# Altium PCB RHD2132_headstage1.PcbDoc
Units mm, origin at the board's own origin, x right, y up, seen from the top; angles counter-clockwise.
Board outline 11.81 x 14.27 mm, 4 copper layers (Top, Route2, Route3, Bottom), stack 2.11 mm thick; 8 components, 19 nets, 88 pads, 23 vias.
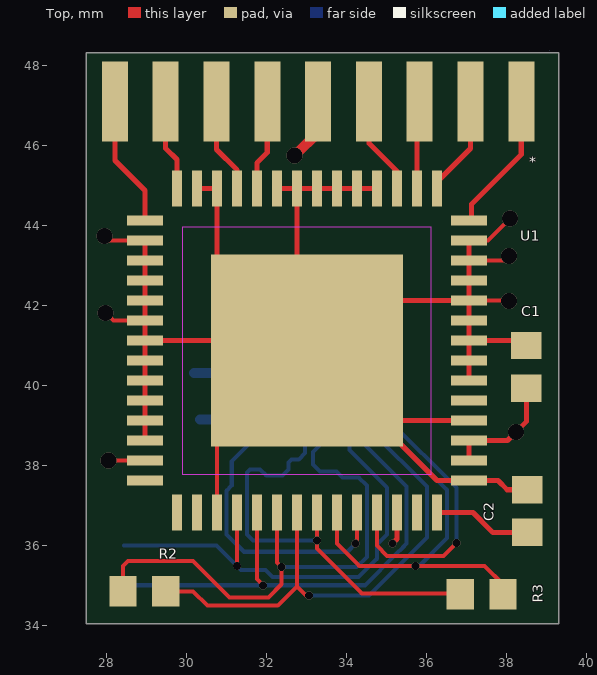
[diagram p0: Top view]
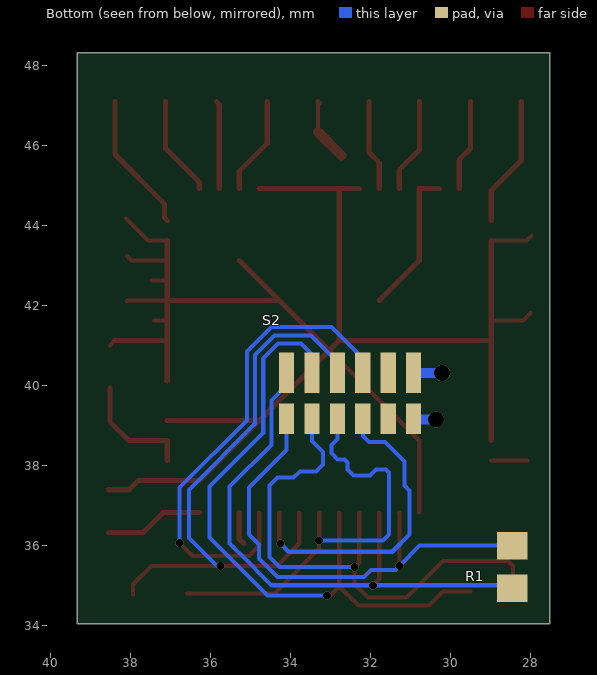
[diagram p1: Bottom view, seen from below]
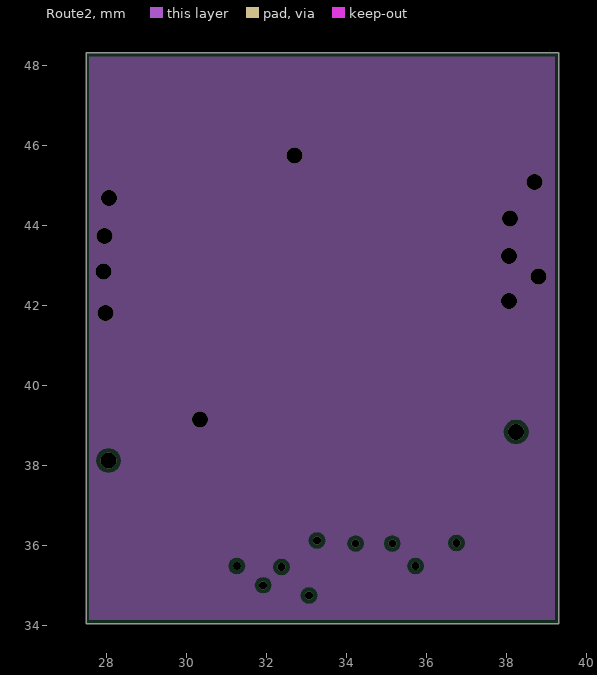
[diagram p2: Route2]
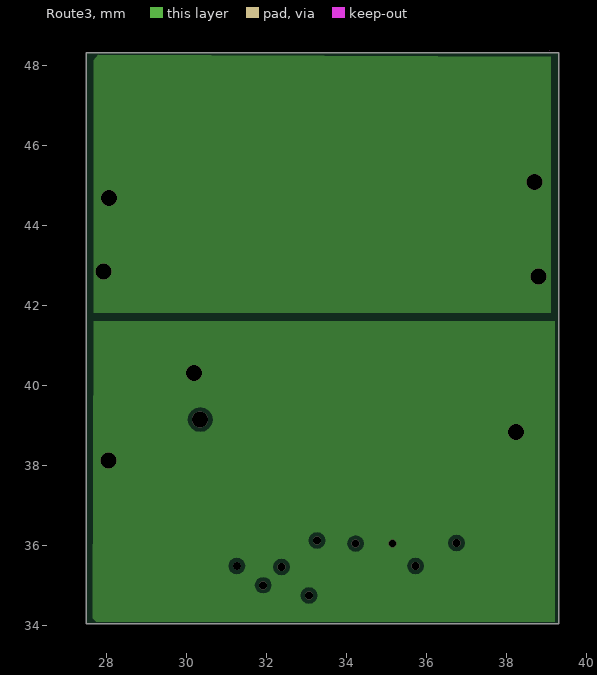
[diagram p3: Route3]

## Layer stack, top to bottom
Top Solder: solder mask 0.0102, Solder Resist, Dk 3.5
Top: signal copper 0.035
Dielectric 1: dielectric 0.32, FR-4, Dk 4.8
Route2: signal copper 0.035
Dielectric 2: prepreg 1.5, FR-4, Dk 4.8
Route3: signal copper 0.035
Dielectric 3: core 0.15, FR-4, Dk 4.8
Bottom: signal copper 0.035
Bottom Solder: solder mask 0.0102, Solder Resist, Dk 3.5

## Board outline
27.508,34.036 27.508,48.311 39.319,48.311 39.319,34.036
cut-out: 39.091,48.362

## Design rules (kind name [scope] priority, off if disabled: settings)
Clearance "Clearance (Same Net)" [All] p1: gap=0.102 ignorepadtopadclearanceinfootprint=FALSE
Clearance [All] p2: gap=0.102 ignorepadtopadclearanceinfootprint=FALSE
HoleSize HoleSize_For_NetClass_power [InNetClass('power')] p1: absolutevalues=TRUE maxlimit=0 minlimit=0 maxpercent=80.000 minpercent=20.000
HoleSize HoleSize_For_NetClass_thick [InNetClass('thick')] p2: absolutevalues=TRUE maxlimit=0 minlimit=0 maxpercent=80.000 minpercent=20.000
HoleSize [All] p3: absolutevalues=TRUE maxlimit=2540 minlimit=0.152 maxpercent=80.000 minpercent=20.000
HoleToHoleClearance mdDrill [All] p1: gap=0.381 allowstackedmicrovias=TRUE
PasteMaskExpansion mlMinCreamFrame [All] p1: expansion=0
PolygonConnect ThermalVias [IsVia] p1: connectstyle=Direct reliefconductorwidth=0.254 reliefentries=4 polygonreliefangle="90 Angle" airgapwidth=0.254
PolygonConnect [All] p2: connectstyle=Relief reliefconductorwidth=0.127 reliefentries=4 polygonreliefangle="90 Angle" airgapwidth=0.254
RoutingVias [All] p1: holewidth=0.152 width=0.457 viastyle="Through Hole" minholewidth=0.152 minwidth=0.457 maxholewidth=2.54 maxwidth=2.54
SolderMaskExpansion mlMinStopFrame [All] p1: expansion=0.102
Width Width_For_NetClass_power [InNetClass('power')] p1: maxlimit=1.219 minlimit=0.254 preferedwidth=0.61
Width Width_For_NetClass_thick [InNetClass('thick')] p2: maxlimit=2.032 minlimit=0.254 preferedwidth=1.016
Width [All] p3: maxlimit=254 minlimit=0.102 preferedwidth=0.102 minimp=50.000000 maximp=50.000000 favimp=50.000000
27 further rules are at their usual default settings.

## Components (designator, comment, footprint, x,y, rotation, side; value= is the part's Value field where it differs from the comment)
* "connector_dechuan" connector_dechuan 34.29,53.899 r0 top
C1 "100n" 0402 38.506,40.462 r90 top
C2 "10n" 0402 38.532,36.855 r90 top
R1 "100" 0402 28.448,35.458 r270 bottom
R2 "100" 0402 28.956,34.849 r0 top
R3 "100" 0402 37.389,34.773 r0 top
S2 "RHD2000-CABLE-AMP-SIDE" OMNETICS_PZN-12-AA 32.499,38.151 r0 bottom
U1 "RHD2132_QFN" QFN56_8_X_8_LARGE 33.02,40.869 r0 top

## Footprints (in the part's own frame and the unit in brackets; to place one, negate y for a bottom-side part, rotate by r counter-clockwise, add the part's x,y. Pads: shape width x height; smd on the part's side, far side on the other; paste and mask are expansions set on the pad)
0402 [mil]
  rect 27x30 smd: 1(-21,0) 2(21,0)
connector_dechuan [mm]
  rect 0.65x2 smd: 1(-6.071,-6.807) 2(-4.801,-6.807) 3(-3.531,-6.807) 4(-2.261,-6.807) 5(-0.991,-6.807) 6(0.279,-6.807) 7(1.549,-6.807) 8(2.819,-6.807) 9(4.089,-6.807)
  body extent -6.13,-7.75 4.06,-5.84, height 0.7
OMNETICS_PZN-12-AA [mil]
  rect 15x30 smd: B1(62.5,-40) B2(37.5,-40) B3(12.5,-40) B4(-12.5,-40) B5(-37.5,-40) B6(-62.5,-40)
  rect 15x40 smd: T1(62.5,-85) T2(37.5,-85) T3(12.5,-85) T4(-12.5,-85) T5(-37.5,-85) T6(-62.5,-85)
QFN56_8_X_8_LARGE [mm]
  rect 0.9x0.25 smd: 1(-4.05,3.25) 2(-4.05,2.75) 3(-4.05,2.25) 4(-4.05,1.75) 5(-4.05,1.25) 6(-4.05,0.75) 7(-4.05,0.25) 8(-4.05,-0.25) 9(-4.05,-0.75) 10(-4.05,-1.25) 11(-4.05,-1.75) 12(-4.05,-2.25) 13(-4.05,-2.75) 14(-4.05,-3.25) 29(4.05,-3.25) 30(4.05,-2.75) 31(4.05,-2.25) 32(4.05,-1.75) 33(4.05,-1.25) 34(4.05,-0.75) 35(4.05,-0.25) 36(4.05,0.25) 37(4.05,0.75) 38(4.05,1.25) 39(4.05,1.75) 40(4.05,2.25) 41(4.05,2.75) 42(4.05,3.25)
  rect 0.25x0.9 smd: 15(-3.25,-4.05) 16(-2.75,-4.05) 17(-2.25,-4.05) 18(-1.75,-4.05) 19(-1.25,-4.05) 20(-0.75,-4.05) 21(-0.25,-4.05) 22(0.25,-4.05) 23(0.75,-4.05) 24(1.25,-4.05) 25(1.75,-4.05) 26(2.25,-4.05) 27(2.75,-4.05) 28(3.25,-4.05) 43(3.25,4.05) 44(2.75,4.05) 45(2.25,4.05) 46(1.75,4.05) 47(1.25,4.05) 48(0.75,4.05) 49(0.25,4.05) 50(-0.25,4.05) 51(-0.75,4.05) 52(-1.25,4.05) 53(-1.75,4.05) 54(-2.25,4.05) 55(-2.75,4.05) 56(-3.25,4.05)
  rect 4.8x4.8 smd: CENTER(0,0)
  Top keep-out region: -3.1,-3.1 -3.1,3.1 3.1,3.1 3.1,-3.1

## Part data
C1 C2: library part C_0402, "Capacitor", DeviceName=_0402, DeviceSetName=C, GateName_1=C, LibraryName=RHD2000_eval_board, SymbolName_1=C
R1 R2 R3: library part R_0402, "Resistor", DeviceName=_0402, DeviceSetName=R, GateName_1=R, LibraryName=RHD2000_eval_board, SymbolName_1=R
S2: DeviceSetName=RHD2000-CABLE-AMP-SIDE, GateName_1=A, LibraryName=RHD2000, SymbolName_1=RHD2000-CABLE
U1: DeviceName=_QFN, DeviceSetName=RHD2132, GateName_1=A, LibraryName=RHD2000, SymbolName_1=RHD2132

## Via types
v1: diameter 0.2, hole 0.2, Top to Bottom, tented both sides, 8 vias
v2: diameter 0.4, hole 0.4, Top to Route2, tented both sides, 6 vias
v3: diameter 0.4, hole 0.4, Route2 to Route3, tented both sides, 4 vias
v4: diameter 0.4, hole 0.4, Top to Route3, tented both sides, 2 vias
v5: diameter 0.4, hole 0.4, Route2 to Bottom, tented both sides, 1 vias
v6: diameter 0.4, hole 0.4, Route3 to Bottom, tented both sides, 1 vias
v7: diameter 0.2, hole 0.2, Top to Route3, tented both sides, 1 vias

## Nets (pads, with @x,y where several pads share a name; then routed paths per layer and width w, separated by ;. In a path a pad name is that pad's centre, name@x,y a point inside that pad or via, vN(x,y) a via of type N, cw(c..) or ccw(c..) an arc to the next point about the centre after c; other vN are vias at no path point)
GND: *.5 C1.2 C2.2 S2.B6 U1.2 U1.3 U1.4 U1.5 U1.6 U1.7 U1.8 U1.9 U1.10 U1.11 U1.12 U1.17 U1.29 U1.32 U1.34 U1.35 U1.36 U1.37 U1.38 U1.39 U1.40 U1.41 U1.46 U1.47 U1.48 U1.49 U1.50 U1.51 U1.54 U1.55 U1.CENTER | length 52.8
  Top w0.102: v2(27.965,43.739) 28.086,43.619 U1.2 ; v2(27.991,41.808) 28.181,41.619 U1.6 ; U1.17 30.77,38.619 U1.CENTER ; *.5@33.299,46.33 *.5 ; U1.37 U1.37@37.402,41.619 ; U1.38 38.069,42.119 v2(38.075,42.113) ; U1.39 U1.39@37.462,42.619 ; U1.40 37.962,43.119 v2(38.075,43.231) ; U1.41 37.548,43.619 v2(38.1,44.171) ; C1.2@38.383,41.119 C1.2
  Top w0.127: U1.12 U1.11 U1.10 U1.9 U1.8 U1.7 ; U1.2 U1.3 U1.4 U1.5 U1.6 U1.7 ; U1.55 U1.54 30.77,43.119 U1.CENTER@31.77,42.119 ; U1.51 U1.50 ; *.5@33.27,47.062 *.5 ; U1.46 U1.47 U1.48 U1.49 U1.50 ; U1.CENTER@35.27,43.119 U1.CENTER@34.27,42.119 ; U1.32 U1.CENTER@34.77,39.119 ; U1.41 U1.40 U1.39 U1.38 ; U1.34@37.082,40.107 U1.34 U1.35 U1.36 ; C1.2@38.383,41.119 U1.36 ; C2.2 38.026,37.389 37.796,37.619 U1.29 36.27,37.619 U1.CENTER@34.77,39.119 ; U1.7 U1.CENTER@32.77,41.119 ; U1.CENTER@32.77,41.119 U1.CENTER ; U1.CENTER@32.77,41.119 U1.50 ; U1.CENTER U1.CENTER@34.77,39.119 ; U1.CENTER U1.CENTER@34.27,42.119 ; U1.CENTER@34.27,42.119 U1.38 ; U1.36 U1.37 U1.38
  Top w0.254: v2(32.715,45.745) *.5@33.299,46.33
  Bottom w0.102: v5(30.353,39.141) v5@30.378,39.116
  Bottom w0.127: S2.B6@30.886,39.141 S2.B6
  Bottom w0.254: v5(30.353,39.141) S2.B6@30.886,39.141
  other v3: 38.811,42.723 27.94,42.85 28.067,44.679 38.71,45.085
Net*_1: *.1 U1.1 | length 3.3
  Top w0.127: *.1 28.219,45.618 28.97,44.868 U1.1
Net*_2: *.2 U1.56 | length 2.3
  Top w0.127: *.2 29.489,45.923 29.77,45.643 U1.56
Net*_3: *.3 U1.53 | length 2.4
  Top w0.127: *.3 30.759,45.898 31.27,45.387 U1.53
Net*_4: *.4 U1.52 | length 2.3
  Top w0.127: U1.52 31.77,45.562 32.029,45.822 *.4
Net*_6: *.6 U1.45 | length 2.5
  Top w0.127: *.6 34.569,46.05 35.27,45.35 U1.45
Net*_7: *.7 U1.44 | length 2.2
  Top w0.127: U1.44 35.77,47.022 *.7
Net*_8: *.8 U1.43 | length 2.5
  Top w0.127: U1.43 36.27,45.084 37.109,45.923 *.8
Net*_9: *.9 U1.42 | length 3.5
  Top w0.127: U1.42 37.135,44.183 37.135,44.526 38.379,45.771 *.9
NetC2_1: C2.1 U1.28 | length 2.5
  Top w0.127: U1.28 37.172,36.819 37.668,36.322 C2.1
NetR1_1: R1.1 S2.B1 U1.18 | length 12.2
  Top w0.102: v1(31.267,35.484) 31.267,36.816 U1.18
  Bottom w0.102: R1.1 30.759,35.992 v1(31.267,35.484) 31.369,35.382 31.98,35.382 32.156,35.206 34.314,35.206 34.773,35.665 34.773,36.019 35.027,36.273 35.027,37.44 34.087,38.379 S2.B1 S2.B1@34.112,39.192
NetR1_2: R1.2 S2.T1 U1.19 | length 14.3
  Top w0.102: U1.19 31.77,35.159 v1(31.928,35.001)
  Bottom w0.102: R1.2 28.524,35.001 v1(31.928,35.001) 34.468,35.001 35.257,35.79 35.258,35.79 35.406,35.938 35.406,35.939 35.509,36.043 35.509,37.465 34.468,38.506 34.468,39.624 34.087,40.005 S2.T1
NetR2_1: R2.1 S2.B2 U1.20 | length 13.9
  Top w0.102: R2.1 28.423,35.484 28.55,35.611 30.175,35.611 31.09,34.696 32.055,34.696 32.385,35.027 v1(32.385,35.458) 32.27,35.573 U1.20
  Bottom w0.102: v1(32.385,35.458) 34.265,35.458 34.519,35.712 34.519,37.49 34.315,37.694 33.909,37.694 33.757,37.846 33.35,37.846 33.172,38.024 33.172,38.329 33.452,38.608 S2.B2 S2.B2@33.401,39.116
NetR2_2: R2.2 S2.T2 U1.21 | length 16.4
  Top w0.102: R2.2 30.175,34.849 30.531,34.493 32.292,34.493 32.77,34.972 ; U1.21 32.77,34.972 ; v1(33.071,34.747) 32.995,34.747 32.77,34.972
  Bottom w0.102: v1(33.071,34.747) 34.569,34.747 36.017,36.195 36.017,37.465 34.671,38.811 34.671,40.676 34.3,41.046 33.731,41.046 33.452,40.767 S2.T2
NetR3_1: R3.1 S2.B3 U1.22 | length 10.8
  Top w0.102: U1.22@33.274,36.815 U1.22 33.27,36.123 v1(33.274,36.119) 33.274,35.916 34.392,34.798 R3.1@36.576,34.798
  Bottom w0.102: S2.B3 32.817,38.659 32.969,38.506 32.969,38.303 32.817,38.151 32.639,38.151 32.563,38.075 32.563,37.897 32.41,37.744 32.004,37.744 31.852,37.897 31.598,37.897 31.521,37.821 31.521,36.271 31.674,36.119 v1(33.274,36.119)
NetR3_2: R3.2 S2.T3 U1.23 | length 15.1
  Top w0.102: U1.23 33.77,36.043 34.329,35.484 v1(35.738,35.484) 37.465,35.484 37.922,35.027 R3.2
  Bottom w0.102: S2.T3@32.817,39.99 S2.T3 32.817,40.589 33.478,41.25 34.384,41.25 34.874,40.76 34.874,39.04 36.525,37.389 36.525,36.18 35.829,35.484 v1(35.738,35.484)
NetS2_B4: S2.B4 U1.24 | length 7.9
  Top w0.102: v1@34.27,36.073 U1.24
  Bottom w0.102: S2.B4 32.182,38.735 32.029,38.583 31.623,38.583 31.14,38.1 31.14,37.49 31.013,37.363 31.013,36.271 31.445,35.839 34.036,35.839 v1(34.239,36.043)
NetS2_T4: S2.T4 U1.25 | length 12.7
  Top w0.102: U1.25 34.77,35.994 35.027,35.738 36.44,35.738 v1(36.762,36.06)
  Bottom w0.102: S2.T4@32.182,39.99 S2.T4 32.182,40.665 32.969,41.453 34.468,41.453 35.077,40.844 35.077,39.124 36.762,37.44 v1(36.762,36.06)
VCC: C1.1 S2.T6 U1.13 U1.26 U1.30 U1.31 | length 5.5
  Top w0.102: v4(28.06,38.119) U1.13
  Top w0.127: v7(35.154,36.043) 35.27,36.159 U1.26 ; U1.30 U1.31 38.034,38.619 38.506,39.091 C1.1
  Bottom w0.102: S2.T6@30.861,40.361 S2.T6
  Bottom w0.254: v6(30.201,40.31) S2.T6
  other v4: 38.252,38.837
pads on no net: S2.B5 S2.T5 U1.14 U1.15 U1.16 U1.27 U1.33

## Polygon pours and split planes (outlines as drawn)
VCC on Route3 "VCC_L03_P000" (solid, pour order 0): 27.661,34.087 39.218,34.087 39.218,41.605 27.688,41.605
GND on Route3 "GND_L03_P002" (solid, pour order 2): 27.661,48.26 27.686,48.235 27.686,41.808 39.116,41.808 39.116,48.209
GND on Route2 "GND_L02_P004" (solid, pour order 4): 27.584,48.209 39.218,48.209 39.218,34.138 27.584,34.138

## Silkscreen, mask and mechanical layers (free items; w line width, h text height)
Dimension:
  the board outline again, w0.051